# Altium PCB reciever1.PcbDoc
Units mm, origin at the board's own origin, x right, y up, seen from the top; angles counter-clockwise.
Board outline 32 x 41.27 mm, 2 copper layers (Top Layer, Bottom Layer), stack 1.635 mm thick; 53 components, 30 nets, 182 pads, 32 vias.
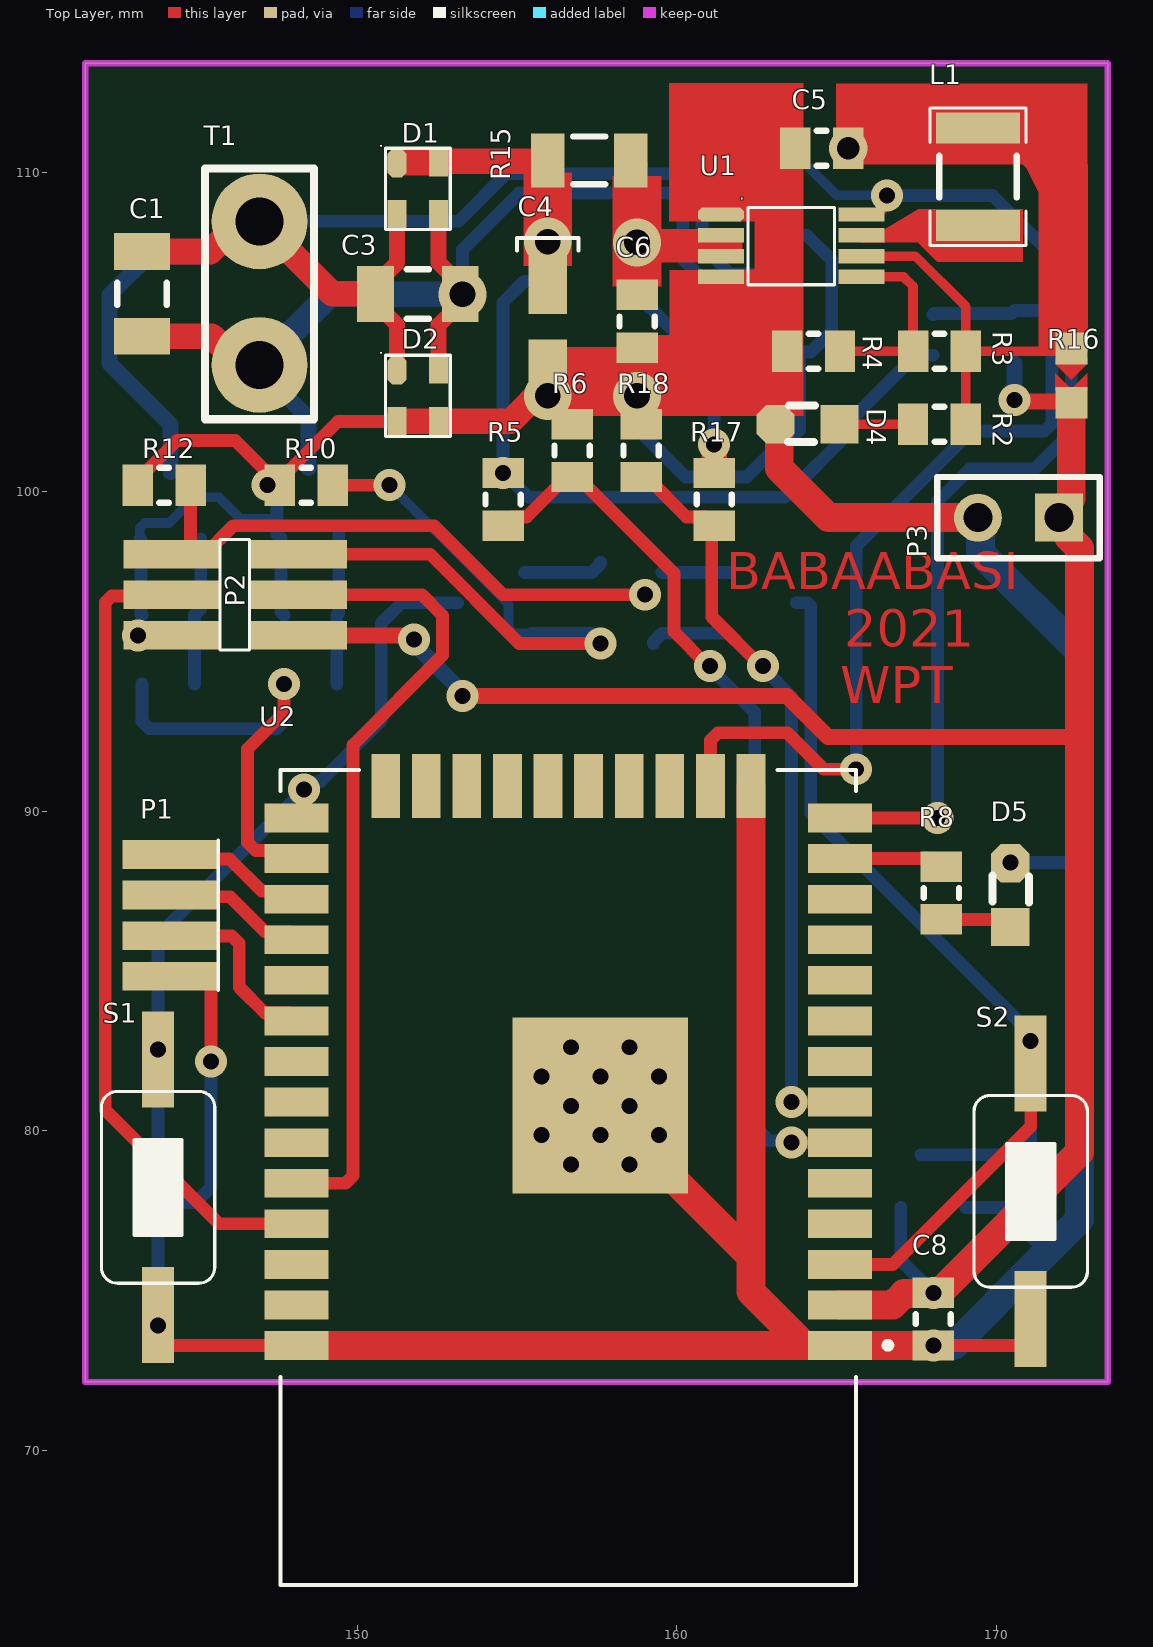
[diagram p0: Top Layer view]
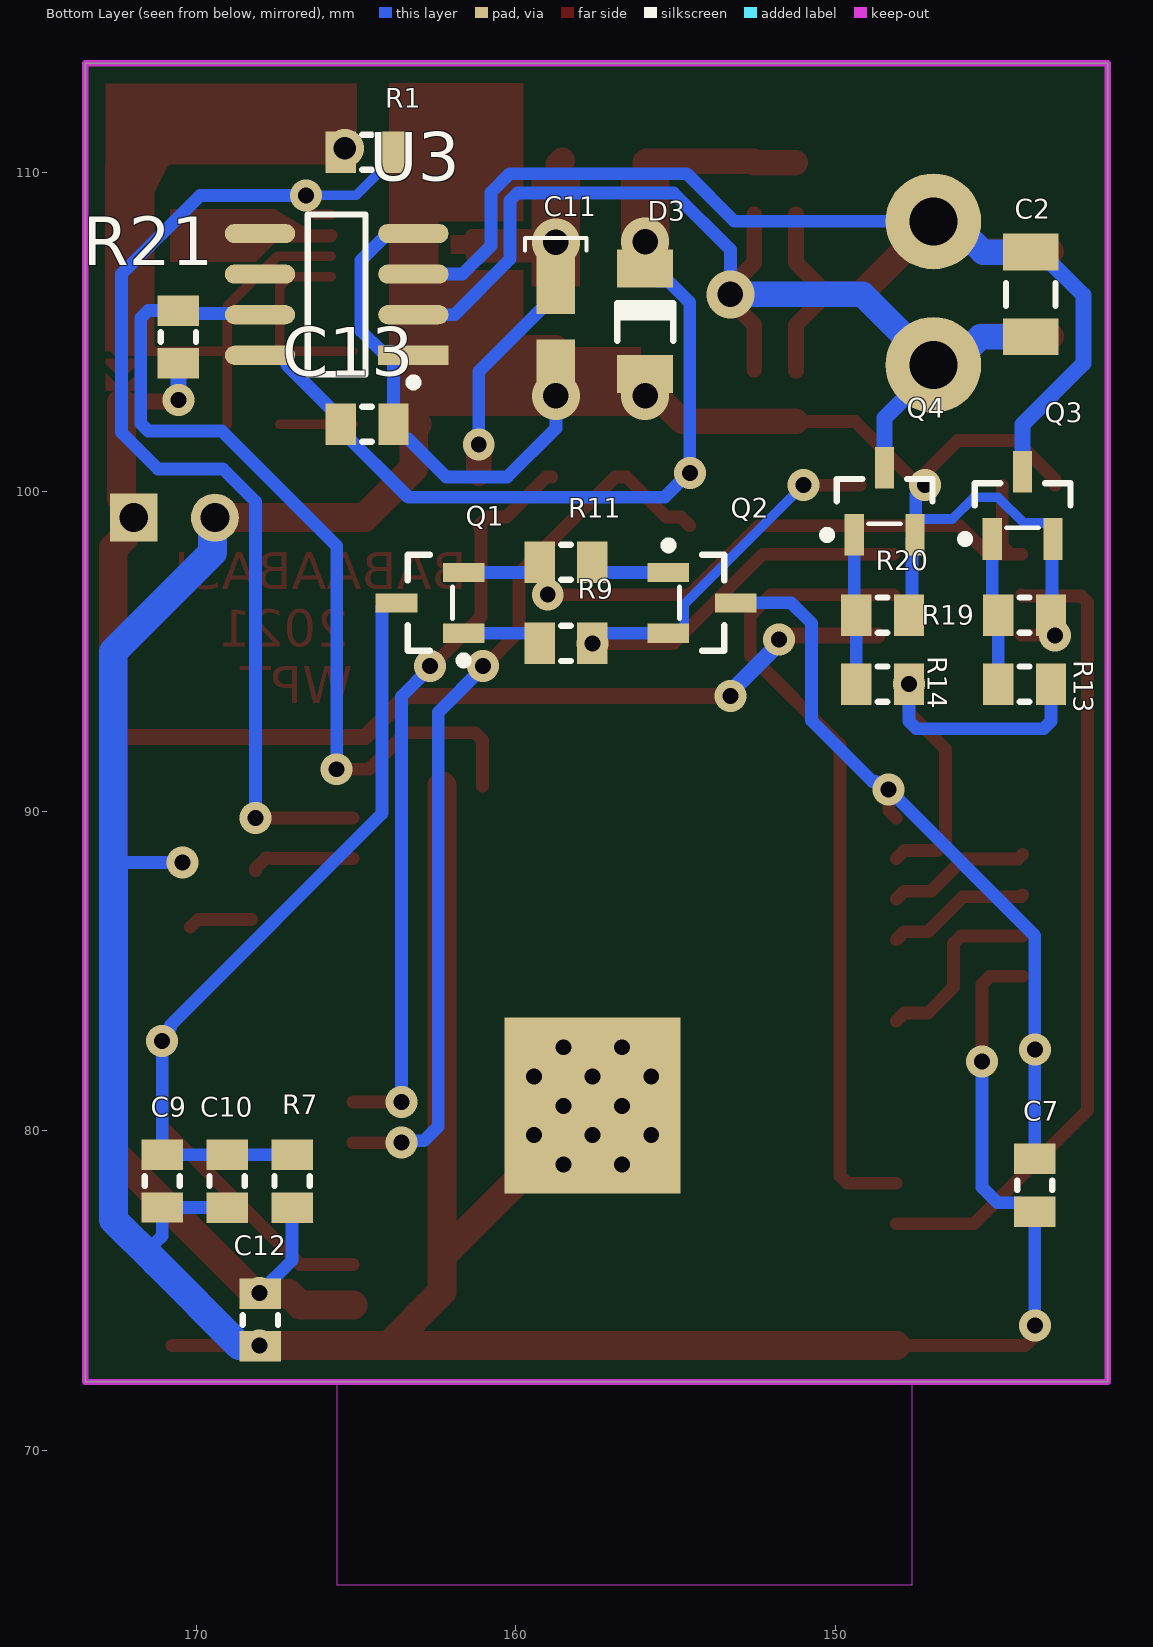
[diagram p1: Bottom Layer view, seen from below]
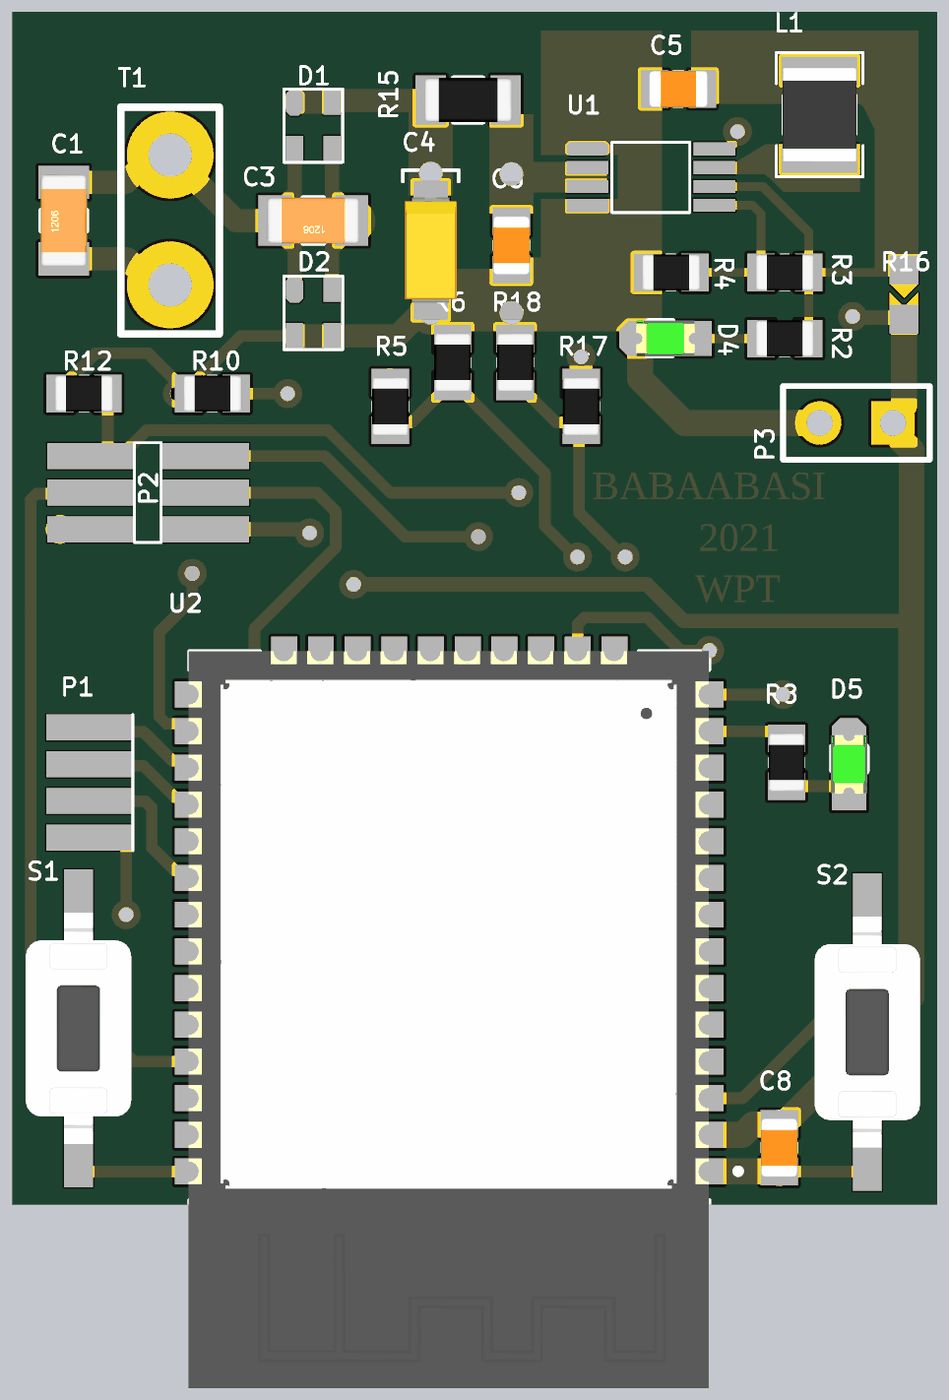
[diagram p2: 3D render of the assembled board from above, using the file's embedded part models]
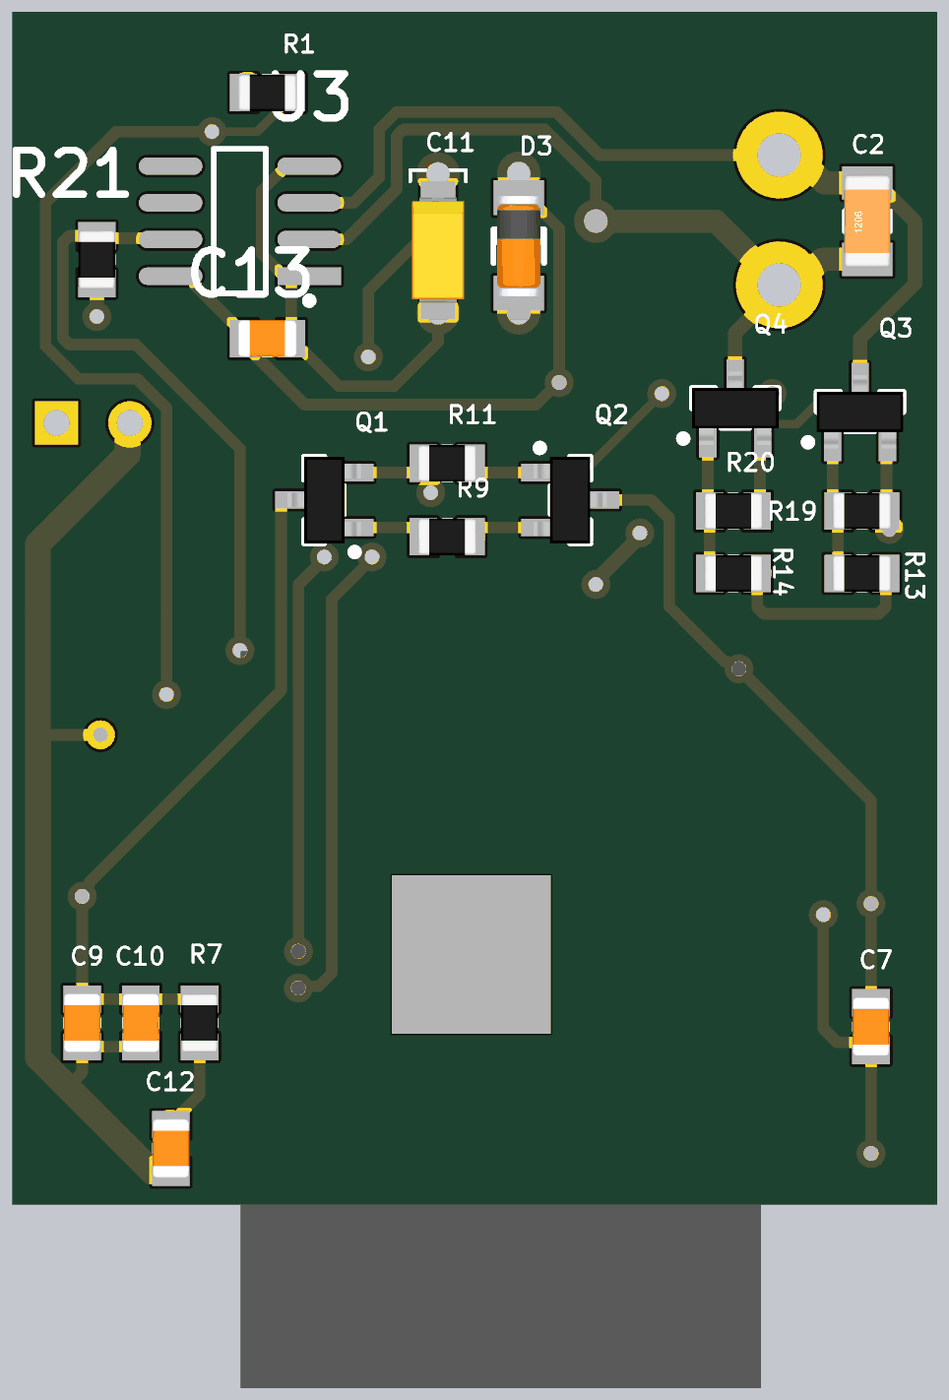
[diagram p3: 3D render of the assembled board from below, using the file's embedded part models]

## Layer stack, top to bottom
Top Solder: solder mask 0.0102, Solder Resist, Dk 3.5
Top Layer: signal copper 0.0175
Dielectric 1: dielectric 1.6, FR-4, Dk 4.8
Bottom Layer: signal copper 0.0175
Bottom Solder: solder mask 0.0102, Solder Resist, Dk 3.5

## Board outline
141.478,72.14 173.482,72.14 173.482,113.411 141.478,113.411

## Design rules (kind name [scope] priority, off if disabled: settings)
Clearance [All] p1: gap=0.2 ignorepadtopadclearanceinfootprint=TRUE except(0: Arc-Hole Track-Hole SMDPad-Hole THPad-Hole Via-Hole Fill-Hole Poly-Hole Region-Hole Text-Hole; 0.254: Arc-Text Track-Text SMDPad-Text THPad-Text Via-Text Fill-Text Poly-Text Region-Text Text-Text)
PolygonConnect [All] p1: connectstyle=Relief reliefconductorwidth=0.254 reliefentries=4 polygonreliefangle="90 Angle" airgapwidth=0.254
RoomDefinition power [InComponentClass('power')] p1 off: confinementstyle=ConfineIn formatcopy=TRUE lockcomponents=FALSE outline 181.356,69.088 237.871,69.088 237.871,98.552 181.356,98.552
RoutingVias [All] p1: holewidth=0.8 width=1.2 viastyle="Through Hole" minholewidth=0.5 minwidth=0.8 maxholewidth=1 maxwidth=1.5
SolderMaskExpansion [All] p1: expansion=0.102 istentingtop=FALSE
Width [All] p1: maxlimit=1 minlimit=0.2 preferedwidth=0.3
30 further rules are at their usual default settings.

## Components (designator, comment, footprint, x,y, rotation, side; value= is the part's Value field where it differs from the comment)
C1 "Cap" "Cap 1206 (3216X15L)" 143.256,106.19 r90 top value=8.2nF
C2 "Cap" "Cap 1206 (3216X15L)" 143.891,106.172 r90 bottom value=4.7nF
C3 "Cap" "Cap 1206 (3216X15L)" 151.892,106.19 r180 top value=2.2nF
C4 "Cap tantal" "Cap1206_(3216X18L)Size A" 155.956,106.559 r270 top
C5 "seramic" SMD_CAP_0805 163.704,110.744 r0 top value=22uF
C6 "seramic" SMD_CAP_0805 158.75,104.506 r90 top value=100nF
C7 "seramic" SMD_CAP_0805 143.764,79.121 r270 bottom value=100nF
C8 "seramic" SMD_CAP_0805 168.021,73.28 r90 top value=100nF
C9 "seramic" SMD_CAP_0805 171.069,79.248 r270 bottom value=100nF
C10 "seramic" SMD_CAP_0805 169.037,79.247 r270 bottom value=100nF
C11 "Cap tantal" "Cap1206_(3216X18L)Size A" 158.75,106.559 r270 bottom
C12 "seramic" SMD_CAP_0805 167.996,73.255 r90 bottom value=22uF
C13 "seramic" SMD_CAP_0805 163.831,102.108 r0 bottom value=100nF
D1 "schotcky diode" UMD4 151.892,109.474 r0 top
D2 "schotcky diode" UMD4 151.892,102.997 r0 top
D3 "15v zener" "Diode 1n4148 SMD" 155.956,103.681 r90 bottom
D4 "LED1" led_0805 164.085,102.108 r180 top
D5 "LED1" led_0805 170.434,87.376 r90 top
L1 "Inductor" IND1210 169.418,109.855 r90 top value=2.2uH
P1 "Header 4" HEADER-1.27MM-1*4 144.145,86.741 r0 top
P2 "Header 3X2" HEADER-1.27MM-SMD-2*3 146.177,96.774 r0 top
P3 "Header 2" HDR1X2 171.958,99.187 r180 top
Q1 "C945" SOT23_N 162.687,96.52 r0 bottom
Q2 "C945" SOT23_N 154.178,96.52 r180 bottom
Q3 "C945" SOT23_N 144.145,99.568 r90 bottom
Q4 "C945" SOT23_N 148.463,99.695 r90 bottom
R1 "Res1" "RES 0805 (2012X06L)" 165.481,110.617 r180 bottom value=100K
R2 "Res1" "RES 0805 (2012X06L)" 169.037,102.108 r180 top value=4.7K
R3 "Res1" "RES 0805 (2012X06L)" 169.038,104.394 r180 top value=47K
R4 "Res1" "RES 0805 (2012X06L)" 165.1,104.394 r180 top value=15K
R5 "Res1" "RES 0805 (2012X06L)" 154.559,100.583 r270 top value="88.7K 0.1%"
R6 "Res1" "RES 0805 (2012X06L)" 156.718,100.457 r90 top value="19.6K 0.1%"
R7 "Res1" "RES 0805 (2012X06L)" 167.005,77.597 r90 bottom value=15K
R8 "Res1" "RES 0805 (2012X06L)" 168.275,88.264 r270 top value=4.7K
R9 "Res1" "RES 0805 (2012X06L)" 157.607,95.25 r0 bottom value=10K
R10 "Res1" "RES 0805 (2012X06L)" 149.224,100.203 r180 top value=100K
R11 "Res1" "RES 0805 (2012X06L)" 159.258,97.79 r180 bottom value=10K
R12 "Res1" "RES 0805 (2012X06L)" 144.78,100.203 r180 top value=100K
R13 "Res1" "RES 0805 (2012X06L)" 143.256,93.98 r0 bottom value=10K
R14 "Res1" "RES 0805 (2012X06L)" 147.701,93.98 r0 bottom value=10K
R15 "Res1" "RES 1206 (3216X08L)" 155.956,110.363 r0 top value="1R 1% 250mw"
R16 "Res1" JUMPER 172.339,103.632 r270 top value=0
R17 "Res1" "RES 0805 (2012X06L)" 161.163,100.584 r270 top value="88.7K 0.1%"
R18 "Res1" "RES 0805 (2012X06L)" 158.877,100.457 r90 top value="19.6K 0.1%"
R19 "Res1" "RES 0805 (2012X06L)" 143.256,96.139 r0 bottom value=100K
R20 "Res1" "RES 0805 (2012X06L)" 147.701,96.139 r0 bottom value=100K
R21 "Res1" "RES 0805 (2012X06L)" 170.561,104.014 r90 bottom value=470
S1 "Switch PB" TACK-SW-3X5X6 143.764,78.232 r90 top
S2 "Switch PB" TACK-SW-3X5X6 171.069,78.105 r90 top
T1 "Terminal" my-term 146.939,106.133 r90 top locked
U1 "TPS62160" DGK-PDSO-G8 163.576,107.696 r270 top
U2 "esp 32 wroom d" ESP-WROOM 156.6,78.539 r180 top
U3 "LM311D" SO8_N 165.608,106.172 r0 bottom

## Footprints (in the part's own frame and the unit in brackets; to place one, negate y for a bottom-side part, rotate by r counter-clockwise, add the part's x,y. Pads: shape width x height; smd on the part's side, far side on the other; paste and mask are expansions set on the pad)
"Cap1206_(3216X18L)Size A" [mm] "Chip Capacitor, 2-Leads, Body 3.2x1.6mm, IPC High Density, chip Tantalum"
  rect 1.999x1.199 smd: 1(0,0) 2(2.8,0)
  silkscreen extent -1.38,-0.97 -0.99,0.97, body extent -0.43,-0.9 3.21,0.9, height 1.8
"Cap 1206 (3216X15L)" [mm] "Chip Capacitor, 2-Leads, Body 3.2x1.6mm, IPC High Density"
  rect 1.15x1.75 smd: 1(-1.325,0) 2(1.325,0)
  silkscreen extent -0.35,-0.77 0.35,0.77, body extent -1.6,-0.8 1.6,0.8, height 1
DGK-PDSO-G8 [mm]
  oct 0.45x1.45 smd mask+0.05: 1(-0.975,-2.2)
  rect 0.45x1.45 smd mask+0.05: 2(-0.325,-2.2) 3(0.325,-2.2) 4(0.975,-2.2) 5(0.975,2.2) 6(0.325,2.2) 7(-0.325,2.2) 8(-0.975,2.2)
  silkscreen extent -1.2,-1.35 1.22,1.35, body extent -1.2,-1.35 1.22,1.35, height 1
"Diode 1n4148 SMD" [mm] "Mini MELF SOD-80"
  rect 1.2x1.75 smd: 1(0,0) 2(3.3,0)
  silkscreen extent 1.04,-0.87 2.22,0.88, body extent -0.13,-0.75 3.37,0.75, height 1.55
ESP-WROOM [mm]
  rect 2x0.9 smd: 1(-8.5,5.26) 2(-8.5,3.99) 3(-8.5,2.72) 4(-8.5,1.45) 5(-8.5,0.18) 6(-8.5,-1.09) 7(-8.5,-2.36) 8(-8.5,-3.63) 9(-8.5,-4.9) 10(-8.5,-6.17) 11(-8.5,-7.44) 12(-8.5,-8.71) 13(-8.5,-9.98) 14(-8.5,-11.25) 25(8.5,-11.25) 26(8.5,-9.98) 27(8.5,-8.71) 28(8.5,-7.44) 29(8.5,-6.17) 30(8.5,-4.9) 31(8.5,-3.63) 32(8.5,-2.36) 33(8.5,-1.09) 34(8.5,0.18) 35(8.5,1.45) 36(8.5,2.72) 37(8.5,3.99) 38(8.5,5.26)
  rect 0.9x2 smd: 15(-5.715,-12.25) 16(-4.445,-12.25) 17(-3.175,-12.25) 18(-1.905,-12.25) 19(-0.635,-12.25) 20(0.635,-12.25) 21(1.905,-12.25) 22(3.175,-12.25) 23(4.445,-12.25) 24(5.715,-12.25)
  round 0.8 hole 0.5: 39(-2.835,-1.322) 39(-2.835,-3.157) 39(-1.917,-0.405) 39(-1.917,-4.075) 39(-1.917,-2.24) 39(-1,-1.322) 39(-1,-3.157) 39(-0.082,-0.405) 39(-0.082,-2.24) 39(-0.082,-4.075) 39(0.835,-1.322) 39(0.835,-3.157)
  rect 5.5x5.5 smd mask+0.05: 39(-1,-2.25)
  rect 5.5x5.5 smd far side mask+0.05: 39(-1,-2.25)
  Keep-Out Layer region: 9,6.45 -9,6.45 -9,12.75 9,12.75
  Keep-Out Layer region: 9,6.45 -9,6.45 -9,12.75 9,12.75
  silkscreen extent -10.1,-12.75 9,12.75, body extent -8.97,-12.75 9.03,12.75, height 3.25
HDR1X2 [mm] "Connector; Header; 2 Position"
  rect 1.5x1.5 hole 0.9: 1(0,0)
  round 1.5 hole 0.9: 2(2.54,0)
  silkscreen extent -1.27,-1.27 3.81,1.27
HEADER-1.27MM-1*4 [mm]
  rect 3x0.9 smd mask+0.05: 1(0,1.905) 2(0,0.635) 3(0,-0.635) 4(0,-1.905)
  silkscreen extent 1.5,-2.35 1.5,2.35
HEADER-1.27MM-SMD-2*3 [mm]
  rect 3x0.9 smd mask+0.05: 1(-2,1.27) 2(2,1.27) 3(-2,0) 4(2,0) 5(-2,-1.27) 6(2,-1.27)
  silkscreen extent -0.48,-1.73 0.45,1.73
IND1210 [mm] "Chip Inductor, 2-Leads, Body 3/20x2/50mm, IPC Medium Density DESIGNER:ABBAS BASEREH"
  rect 0.97x2.62 smd: 1(-1.52,0) 2(1.52,0)
  silkscreen extent -2.15,-1.5 2.15,1.5, body extent -1.63,-1.28 1.63,1.28, height 0.55
JUMPER [mm]
  rect 1x1 smd mask+0.05: 1(-0.85,0) 2(0.85,0)
  Top Layer region: 0.475,0.5 -0.075,0.5 0.475,-0.05
  Top Layer region: 0.475,0.05 0.475,-0.5 -0.075,-0.5
  Top Layer region: -0.375,0.5 0.125,0 -0.375,-0.5 -0.525,-0.5 -0.525,0.5
led_0805 [mm]
  rect 1.2x1.2 smd: 1(-1,0)
  oct 1.2x1.2 smd: 2(1,0)
  silkscreen extent -0.23,-0.58 0.61,0.56, body extent -1.01,-0.63 1.01,0.62, height 1.1
my-term [mm]
  round 3 hole 1.5: 1(-2.168,0) 2(2.325,0)
  silkscreen extent -3.87,-1.7 3.98,1.71
"RES 0805 (2012X06L)" [mm] "Chip Resistor, 2-Leads, Body 2.0x1.3mm, IPC High Density _ (0.100 W)"
  rect 0.95x1.3 smd: 1(0,0) 2(1.65,0)
  silkscreen extent 0.67,-0.55 0.97,0.55, body extent -0.19,-0.63 1.84,0.64, height 0.6
"RES 1206 (3216X08L)" [mm] "Chip Resistor, 2-Leads, Body 3.2x1.6mm, IPC High Density _ (0.125 W)"
  rect 1.05x1.7 smd: 1(0,0) 2(2.596,0)
  silkscreen extent 0.8,-0.75 1.8,0.75, body extent -0.23,-0.76 2.82,0.76, height 0.6
SMD_CAP_0805 [mm]
  rect 0.95x1.3 smd: 1(0,0) 2(1.65,0)
  silkscreen extent 0.67,-0.55 0.97,0.55, body extent -0.19,-0.63 1.84,0.63, height 0.65
SO8_N [mm] "SOIC, 8-Leads, Body 4.9x3.9mm, Pitch 1.27mm, IPC Medium Density"
  rect 2.2x0.6 smd: 1(-2.4,1.905)
  oval 2.2x0.6 smd: 2(-2.4,0.635) 3(-2.4,-0.635) 4(-2.4,-1.905) 5(2.4,-1.905) 6(2.4,-0.635) 7(2.4,0.635) 8(2.4,1.905)
  silkscreen extent -2.52,-2.5 0.9,2.88, body extent -1.95,-2.45 1.95,2.45, height 1.75
SOT23_N [mm] "SOT23, 3-Leads, Body 2.9x1.3mm, Pitch 0.95mm, Lead Span 2.3mm, IPC Medium Density"
  rect 1.3x0.6 smd: 1(-1.05,0.95) 2(-1.05,-0.95) 3(1.05,0)
  silkscreen extent -1.17,-1.5 0.7,1.92, body extent -1.27,-1.5 1.27,1.5, height 1.1
TACK-SW-3X5X6 [mm]
  rect 3x1 smd mask+0.05: 1(-4,0) 2(4,0)
  silkscreen extent -3,-1.78 3,1.78, body extent -4,-1.75 4,1.75, height 4.3
UMD4 [mm]
  oct 0.6x0.9 smd mask+0.05: 1(-0.65,0.8)
  rect 0.6x0.9 smd mask+0.05: 2(-0.65,-0.8) 3(0.65,-0.8) 4(0.65,0.83)
  silkscreen extent -1.02,-1.27 1.02,1.27, body extent -1.05,-0.43 1.05,0.5, height 1

## Part data
C1 C2 C3: "Capacitor", LatestRevisionDate=17-Jul-2002, LatestRevisionNote="Re-released for DXP Platform.", PackageDescription="Radial Cap, Thru-Hole; 2 Leads; 0.3 in Pin Spacing", PackageReference=RAD-0.3, Published=8-Jun-2000, Publisher="Altium Limited"
C4 C11: library part "Cap electrolitic radial 10x21", Data=16-12-2016, Designer="Abbas Basereh", Part. No=22U/25V
C5 C6 C7 C8 C9 C10 C12 C13: library part Cap, "Capacitor", LatestRevisionDate=17-Jul-2002, LatestRevisionNote="Re-released for DXP Platform.", PackageDescription="Radial Cap, Thru-Hole; 2 Leads; 0.3 in Pin Spacing", PackageReference=RAD-0.3, Published=8-Jun-2000, Publisher="Altium Limited"
D1 D2: library part RB481
D3: library part "D Zener", "Zener Diode", LatestRevisionDate=17-Jul-2002, LatestRevisionNote="Re-released for DXP Platform.", PackageDescription="Diode, Thru-Hole; 2 Leads; 0.7 in Pin Spacing", PackageReference=DIODE-0.7, Published=8-Jun-2000, Publisher="Altium Limited"
D4 D5: "Typical RED GaAs LED", LatestRevisionDate=08-Jul-2005, LatestRevisionNote="Mech Layer 1 removed.", PackageDescription="LED; 2 Leads", PackageReference=LED-1, Published=8-Jun-2000, Publisher="Altium Limited"
P1: "Header, 4-Pin", LatestRevisionDate=17-Jul-2002, LatestRevisionNote="Re-released for DXP Platform.", Publisher="Altium Limited"
P2: "Header, 3-Pin, Dual row", LatestRevisionDate=17-Jul-2002, LatestRevisionNote="Re-released for DXP Platform.", Publisher="Altium Limited"
P3: "Header, 2-Pin", LatestRevisionDate=17-Jul-2002, LatestRevisionNote="Re-released for DXP Platform.", Publisher="Altium Limited"
Q1 Q2 Q3 Q4: "NPN Silicon Epitaxial Planar Transistor", ComponentLink1Description="Manufacturer Link", ComponentLink1URL=http://www.taitroncomponents.com/, ComponentLink2Description=Datasheet, ComponentLink2URL=http://www.taitroncomponents.com/, DatasheetVersion=2017, LatestRevisionDate=2017, LatestRevisionNote="IPC-7351 Footprint Added.", PackageDescription="3-Pin SOT-23 Package 0.95 mm Pitch, 2.3 mm Lead Span", PackageReference=SOT23, PackageVersion=2017-2-8, Published=2017-2-8, Publisher="Abbas Basereh"
R1 R2 R3 R4 R5 R6 R7 R8 R9 R10 R11 R12 R13 R14 R15 R16 R17 R18 R19 R20 R21: "Resistor", LatestRevisionDate=17-Jul-2002, LatestRevisionNote="Re-released for DXP Platform.", PackageDescription="Axial Device, Thru-Hole; 2 Leads; 0.3 in Pin Spacing", PackageReference=AXIAL-0.3, Published=8-Jun-2000, Publisher="Altium Limited"
S1 S2: "Push Button Switch"
T1: library part "Terminal 1*2", "Terminal 2 Pin 250VAC 16A", ComponentLinkURL=www.picpars.com, Designer="Seyed Mohsen Ghasemain", E-mail=picpars@gmail.com
U2: library part ESP32-wroom
U3: "Voltage Comparator", Code_IPC=SOIC127P600-8, Code_JEDEC=MS-012-AA, ComponentLink1Description="Manufacturer Link", ComponentLink1URL=http://www.st.com/, ComponentLink2Description=Datasheet, ComponentLink2URL=http://www.st.com/stonline/products/literature/ds/4848/lm211.pdf, DatasheetVersion=Oct-1997, LatestRevisionDate=13-Apr-2006, LatestRevisionNote="IPC-7351 Footprint Added.", PackageDescription="8-Pin Small Outline Integrated Circuit 1.27 mm Pitch", PackageReference=SO8, PackageVersion=Dec-2002, Published=24-Aug-2001, Publisher="Altium Limited"
L1: Code_IEC=1005, Code_JEITA=0402, LatestRevisionDate=29-May-2009, LatestRevisionNote="IPC-7351 Footprint Added.", PackageDescription="Chip Inductor", PackageReference=0402-A, Published=8-Jun-2000, Publisher="Altium Limited"

## Via types
v1: diameter 1, hole 0.5, Top Layer to Bottom Layer, tented both sides, 25 vias
v2: diameter 1.5, hole 0.8, Top Layer to Bottom Layer, tented both sides, 5 vias
v3: diameter 1, hole 0.5, Top Layer to Bottom Layer, 1 vias
v4: diameter 1.2, hole 0.7, Top Layer to Bottom Layer, tented both sides, 1 vias

## Nets (pads, with @x,y where several pads share a name; then routed paths per layer and width w, separated by ;. In a path a pad name is that pad's centre, name@x,y a point inside that pad or via, vN(x,y) a via of type N, cw(c..) or ccw(c..) an arc to the next point about the centre after c; other vN are vias at no path point)
3v3: C8.2 C12.2 P2.6 P3.1 R7.1 R16.2 R21.1 U2.2 | length 64.6
  Top Layer w0.5: P2.6@148.685,95.504 151.503,95.504 151.63,95.377 v1(151.765,95.377) ; v1(153.289,93.599) 163.449,93.599 164.719,92.329 172.466,92.329 172.593,92.456 ; v1(170.561,102.87) 170.605,102.826 172.295,102.826 R16.2
  Top Layer w0.9: U2.2 166.751,74.549 167.107,74.905 167.996,74.905 v1(168.021,74.93) 168.196,74.93 168.221,74.955 172.593,79.327 172.593,92.329 ; R16.2 172.339,99.786 172.258,99.705 172.258,99.487 172.036,99.265 172.258,99.043 172.258,98.568 172.599,98.227 172.599,92.456
  Bottom Layer w0.4: R7.1 167.005,75.946 v1(168.021,74.93)
  Bottom Layer w0.5: v1(151.765,95.377) 151.765,95.25 153.289,93.726 v1(153.289,93.599) ; v1(170.561,102.87) R21.1
3v3_reg: C5.2 L1.2 R1.1 R2.1 R3.1 R16.1 U1.6 | length 23.7
  Top Layer w0.3: U1.6 167.457,107.371 169.038,105.79 R3.1 R3.1 ; R2.1 R3.1 ; R16.1 172.25,104.393 R3.1
  Top Layer w0.8: v4(165.354,110.744) 167.962,110.744 168.593,111.375 L1.2 170.243,111.375 172.339,109.279 R16.1@172.339,104.582
AC1: C1.2 C2.2 C3.2 D1.2 D2.1 Q3.3 T1.2 U3.3 | length 45.2
  Top Layer w0.5: D2.1 151.242,105.215 150.567,105.89 C3.2 150.567,106.49 151.242,107.165 D1.2
  Top Layer w0.8: C1.2 145.401,107.515 146.344,108.458 T1.2 149.207,106.19 C3.2
  Bottom Layer w0.4: T1.2 153.162,108.458 154.651,109.947 160.196,109.947 160.782,109.361 160.782,107.696 161.671,106.807 U3.3
  Bottom Layer w0.5: C2.2 143.591,107.497 142.24,106.146 142.24,104.013 144.145,102.108 Q3.3
  Bottom Layer w0.8: C2.2 145.383,107.497 146.344,108.458 T1.2
AC2: C1.1 C2.1 C3.1 D1.3 D2.4 Q4.3 T1.1 U3.2 | length 38.7
  Top Layer w0.5: D2.4 152.542,105.215 153.217,105.89 C3.1 153.217,106.49 152.542,107.165 D1.3
  Top Layer w0.8: C1.1 145.444,104.865 146.344,103.965 T1.1
  Bottom Layer w0.4: v2(153.289,106.172) 153.289,107.569 155.067,109.347 159.948,109.347 160.182,109.113 160.182,107.28 161.925,105.537 U3.2
  Bottom Layer w0.5: T1.1 146.939,103.831 148.463,102.307 Q4.3
  Bottom Layer w0.8: C2.1 145.462,104.847 146.344,103.965 T1.1 149.146,106.172 v2(153.289,106.172)
DTR: P2.2 Q2.2 R9.1 R10.1 | length 21.3
  Top Layer w0.4: P2.2 152.273,98.044 155.067,95.25 v1(157.607,95.25) ; R10.1 v1(151.003,100.203)
  Bottom Layer w0.3: v1(151.003,100.203) 154.728,96.478 154.728,95.72 154.878,95.57 Q2.2
  Bottom Layer w0.4: Q2.2@155.448,95.57 157.332,95.57 157.607,95.295 v1(157.607,95.25)
EN: C9.1 C10.1 Q1.3 R7.2 S2.2 U2.3 | length 34
  Top Layer w0.4: U2.3 166.751,75.819 171.069,80.137 S2.2
  Bottom Layer w0.4: Q1.3 164.087,96.52 164.187,96.42 164.187,89.928 170.812,83.303 170.812,83.223 170.99,83.046 v1@171.069,83.046 ; R7.2@167.64,79.248 C9.1 C9.1@171.344,79.248 ; v1(171.069,82.804) 171.069,79.523 C9.1@171.344,79.248 ; C9.1@171.45,79.248 C9.1@171.344,79.248
GND: C4.2 C5.1 C6.1 C7.2 C8.1 C9.2 C10.2 C11.2 C12.1 C13.1 D2.2 D2.3 D3.1 D4.2 D5.2 P1.4 P2.5 P3.2 Q3.2 Q4.2 R4.2 R6.2 R10.2 R12.2 R18.2 R19.1 R20.1 S1.1 S2.1 U1.1 U1.4 U2.1 U2.15 U2.38 U2.39 U3.1 U3.4 | length 175.3
  Top Layer w0.4: v1(143.129,95.504) P2.5 ; R12.2 143.13,100.378 144.352,101.6 146.177,101.6 R10.2@147.124,100.653 ; v1(143.764,73.906) 143.764,73.579 144.064,73.279 U2.38 ; P1.4 145.165,84.836 145.415,84.586 v1(145.415,82.169) ; R10.2@147.574,100.378 149.393,102.197 D2.2 ; v2(158.75,102.997) v2@158.877,102.87 ; U1.4 161.401,106.746 163.131,106.746 ; U1.1 161.876,108.671 162.699,109.494 ; 162.814,110.744 162.699,110.629 162.699,109.494 ; D4.2 163.085,102.291 163.45,102.656 R4.2 ; R4.2@163.45,104.431 163.45,106.427 162.699,107.178 162.699,109.494 ; v1(168.02,73.279) v1(168.02,73.279) S2.1@170.769,73.28
  Top Layer w0.8: D2.2 D2.3 154.794,102.197 155.956,103.359 v2(155.956,102.997) C4.2 157.828,103.759 C6.1@158.226,104.156 ; C6.1 163.375,104.506 163.45,104.431 R4.2
  Top Layer w0.9: U2.38 164.001,73.279 ; U2.39@157.6,80.789 162.315,76.074 ; U2.15 162.315,76.074 ; D4.2 163.199,101.994 163.199,100.73 164.742,99.187 P3.2 ; v1(168.02,73.279) U2.1 164.001,73.279 ; 162.315,76.074 162.315,74.965 164.001,73.279
  Bottom Layer w0.3: Q3.2 143.195,98.868 143.345,99.018 144.105,99.018 144.909,99.822 145.669,99.822 146.346,99.145 147.363,99.145 Q4.2@147.488,99.02
  Bottom Layer w0.4: Q3.2 143.226,98.487 143.226,96.169 R19.1 ; v1(143.764,73.906) C7.2@143.764,77.089 ; C7.2 C7.2@143.764,77.089 ; v1(145.415,82.169) 145.415,78.232 144.929,77.746 144.214,77.746 144.043,77.575 144.043,77.368 C7.2@143.764,77.089 ; v1(147.193,100.203) 147.488,99.908 147.488,99.02 147.488,98.67 Q4.2 147.607,98.551 147.607,96.233 R20.1 ; v2(158.75,102.997) 158.75,101.981 160.274,100.457 162.18,100.457 163.381,101.658 163.556,101.658 163.831,101.933 C13.1 163.831,104.167 U3.1@163.731,104.267 ; U3.1 U3.1@163.731,104.267 ; U3.4 163.273,108.012 164.073,108.012 164.846,107.239 164.846,105.029 164.184,104.367 163.831,104.367 U3.1@163.731,104.267 ; C10.2 C9.2 ; v3(170.434,88.392) 172.605,88.392 172.732,88.265 ; C9.2 171.069,76.708 171.259,76.518
  Bottom Layer w0.8: v2(155.956,102.997) D3.1 ; v2(158.75,102.997) C11.2
  Bottom Layer w0.9: v1(168.02,73.279) 168.656,73.279 171.259,75.882 172.593,77.216 172.593,88.392 ; P3.2 169.495,99.11 169.495,98.094 172.601,94.988 172.601,88.396
IO0: C7.1 Q2.3 S1.2 U2.25 | length 23.5
  Top Layer w0.4: S1.2 v1(143.764,82.55) ; U2.25 148.336,90.025 v1(148.336,90.678)
  Bottom Layer w0.4: C7.1@143.764,79.374 v1(143.764,82.55) 143.764,86.106 v1(148.336,90.678) 148.498,90.678 148.749,90.929 148.841,90.929 150.749,92.837 150.749,95.885 151.384,96.52 Q2.3
IO16: P1.1 U2.27 | length 4.5
  Top Layer w0.4: P1.1 144.288,88.503 146.001,88.503 147.005,87.499 147.85,87.499 U2.27
IO17: P1.2 U2.28 | length 4.5
  Top Layer w0.4: P1.2 144.198,87.323 146.011,87.323 147.104,86.229 147.85,86.229 U2.28
IO18: P1.3 U2.30 | length 5.9
  Top Layer w0.4: P1.3 144.157,86.094 146.07,86.094 146.304,85.86 146.304,84.489 147.104,83.689 147.85,83.689 U2.30
led: R8.1 U2.13 | length 3.2
  Top Layer w0.4: U2.13 R8.1@167.641,88.519 ; R8.1@167.748,88.539 167.825,88.539 168.149,88.215 R8.1@168.149,88.138
LSK: R13.1 R14.1 U2.26 | length 14.1
  Top Layer w0.4: v1(147.701,93.98) 147.701,93.091 146.558,91.948 146.558,89.027 146.816,88.769 147.85,88.769 U2.26
  Bottom Layer w0.4: R13.1 143.256,92.817 143.49,92.583 147.467,92.583 147.701,92.817 v1(147.701,93.98)
NetD4_1: D4.1 R2.2 | length 2.3
  Top Layer w0.3: D4.1 R2.2
NetD5_1: D5.1 R8.2 | length 2
  Top Layer w0.4: R8.2 169.942,86.614 D5.1@170.18,86.376
NetL1_1: L1.1 U1.7 | length 3.9
  Top Layer w0.4: U1.7 165.801,107.996 167.61,107.996 167.742,107.863 168.121,107.863 168.593,108.335 L1.1
NetQ1_1: Q1.1 R9.2 | length 2.5
  Bottom Layer w0.4: R9.2 159.257,95.295 159.532,95.57 Q1.1
NetQ2_1: Q2.1 R11.2 | length 2.5
  Bottom Layer w0.4: Q2.1 157.333,97.47 157.608,97.745 R11.2
NetQ3_1: Q3.1 R13.2 R19.2 | length 4.6
  Bottom Layer w0.4: R13.2 R19.2 145.095,96.328 Q3.1
NetQ4_1: Q4.1 R14.2 R20.2 | length 4.7
  Bottom Layer w0.3: R20.2 R20.2@149.413,96.201
  Bottom Layer w0.4: R14.2 R20.2 ; R20.2@149.413,96.201 Q4.1
NetR3_2: R3.2 R4.1 U1.5 | length 6.1
  Top Layer w0.3: R4.1 R3.2 167.386,104.396 167.386,106.426 167.091,106.721 U1.5
PG: R1.2 U1.8 U2.14 | length 34.4
  Top Layer w0.3: U1.8 166.276,108.671 166.44,108.835 166.44,109.136 v1(166.574,109.27)
  Top Layer w0.4: U2.14 v1(168.148,89.789)
  Bottom Layer w0.3: R1.2 163.831,110.442 165.003,109.27 v1(166.574,109.27)
  Bottom Layer w0.4: v1(166.574,109.27) 169.876,109.27 172.339,106.807 172.339,101.854 171.196,100.711 169.164,100.711 168.148,99.695 v1(168.148,89.789)
RTS: P2.1 Q1.2 R11.1 R12.1 | length 20.5
  Top Layer w0.4: P2.1 P2.1@144.53,98.044 ; R12.1 144.78,98.294 P2.1@144.53,98.044 ; v1(159.004,96.774) 154.559,96.774 152.4,98.933 146.116,98.933 145.227,98.044 P2.1@144.53,98.044
  Bottom Layer w0.4: R11.1@159.533,97.47 Q1.2
RXD: P2.4 U2.34 | length 25.3
  Top Layer w0.4: U2.34 149.626,78.359 149.86,78.593 149.86,92.075 152.665,94.88 152.665,96.128 152.019,96.774 P2.4
TXD: P2.3 U2.35 | length 25.5
  Top Layer w0.4: P2.3 144.141,96.738 142.311,96.738 142.113,96.54 142.113,80.645 145.669,77.089 U2.35
Vrec: C4.1 C13.2 D1.1 D1.4 D3.2 R5.1 R15.1 U3.8 | length 31.2
  Top Layer w0.5: D1.1 D1.1@151.257,110.289 ; D1.4@152.527,110.289 D1.4
  Top Layer w0.8: D1.1@151.257,110.289 D1.4@152.527,110.289 ; D1.4 152.572,110.334 155.927,110.334 155.956,110.304 v2(155.956,107.823)
  Bottom Layer w0.4: D3.2 155.556,106.581 155.222,106.581 154.559,105.918 v1(154.559,100.584) 154.591,100.584 155.353,99.822 163.37,99.822 165.481,101.933 C13.2 165.481,102.283 167.17,103.972 167.17,104.175 167.262,104.267 U3.8
  Bottom Layer w0.8: D3.2 v2(155.956,107.823)
Vrec1: C6.2 C11.1 R15.2 R17.1 U1.2 U1.3 | length 17.9
  Top Layer w0.4: v2@158.75,107.569 158.948,107.371 U1.3 ; v2@158.75,108.035 158.764,108.021 U1.2
  Top Layer w0.8: R15.2 158.677,110.238 158.677,109.517 158.75,109.444 158.75,108.035 v2(158.75,107.802) 158.75,107.569 C6.2 ; R17.1 v1(161.163,101.473)
  Bottom Layer w0.4: v2(158.75,107.802) 158.75,106.159 159.149,105.759 159.163,105.759 161.163,103.759 v1(161.163,101.473)
Vsen1: R5.2 R6.1 U2.6 | length 28.5
  Top Layer w0.4: R5.2 154.834,99.208 155.294,99.208 156.543,100.457 156.893,100.457 159.904,97.446 159.904,95.62 160.975,94.549 v1(161.036,94.549) ; v1(163.583,79.629) U2.6
  Bottom Layer w0.4: v1(161.036,94.549) 161.036,94.488 162.433,93.091 162.433,80.137 162.881,79.689 163.516,79.689 163.576,79.629 v1(163.583,79.629)
Vsen2: R17.2 R18.1 U2.7 | length 23.6
  Top Layer w0.4: R18.1 159.052,100.457 160.3,99.209 160.888,99.209 R17.2 161.09,98.861 161.09,96.085 162.626,94.549 v1(162.687,94.549) ; v1(163.583,80.899) U2.7
  Bottom Layer w0.4: v1(162.687,94.549) 162.687,94.488 163.583,93.592 v1(163.583,80.899)
Zero_cross: R21.2 U2.16 U3.7 | length 28.4
  Top Layer w0.4: U2.16 161.045,92.222 161.279,92.456 163.449,92.456 164.592,91.313 v1(165.608,91.313)
  Bottom Layer w0.4: v1(165.608,91.313) 165.608,98.298 169.207,101.897 171.505,101.897 171.739,102.132 171.739,105.43 171.505,105.664 R21.2 170.472,105.575 168.046,105.575 U3.7
pads on no net: U2.4 U2.5 U2.8 U2.9 U2.10 U2.11 U2.12 U2.17 U2.18 U2.19 U2.20 U2.21 U2.22 U2.23 U2.24 U2.29 U2.31 U2.32 U2.33 U2.36 U2.37 U3.5 U3.6

## Keep-outs
Keep-Out Layer:
  the board outline again, w0.2

## Other copper
Top Layer:
  rectangle net Vrec: 155.194,107.061 156.718,109.982
  rectangle net Vrec1: 157.988,106.426 159.512,109.878
  rectangle net GND: 156.083,102.362 163.957,104.521
  rectangle net GND: 159.766,104.267 162.941,106.934
  rectangle net Vrec1: 158.75,107.442 162.052,108.035
  rectangle net 3v3_reg: 164.973,110.236 172.847,112.776
  region net 3v3_reg: 170.815,110.363 172.72,110.363 172.847,110.236 172.847,104.394 171.323,104.394 171.323,109.347
  region net NetL1_1: 166.497,108.204 167.546,108.839 170.815,108.839 170.815,107.95 166.497,107.95
  region net NetL1_1: 167.505,107.831 168.148,107.188 170.815,107.188 170.815,108.712
  region net GND: 163.957,112.776 159.766,112.776 159.766,108.458 162.433,108.458 162.433,104.267 163.957,104.267
  text "BABAABASI" at 161.544,96.548 h2
  text "2021" at 165.227,94.762 h2
  text "WPT" at 165.102,92.992 h2

## Text inside footprints (layer, text, board x,y; h text height)
U2: Mechanical 13 "ANTENNA" at 162.6,69.539 h1.78 r180